# EAGLE board B4SR3350 (EAGLE 9.3.0), part 1 of 3
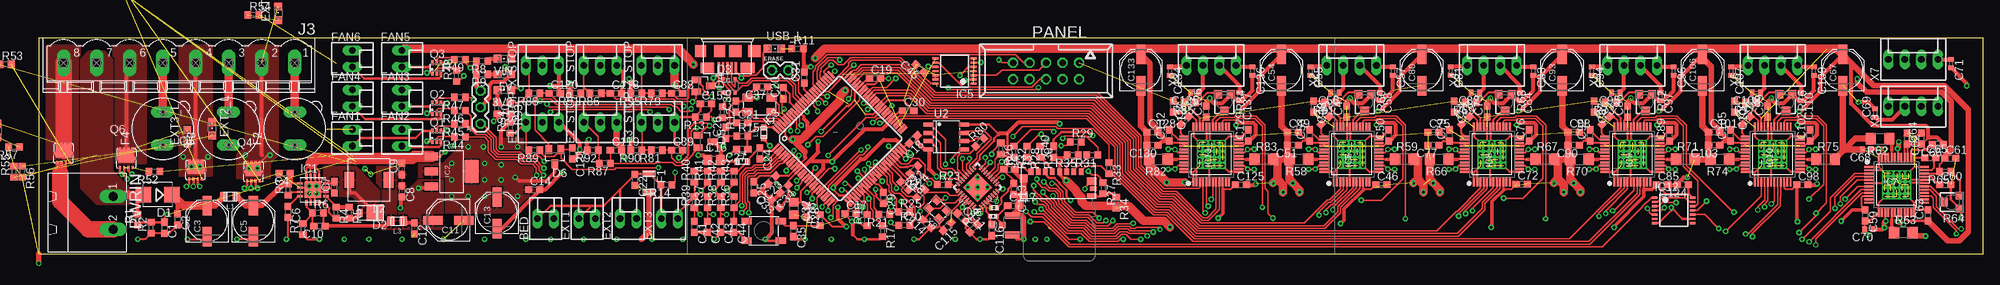
[diagram p0: board, top side]
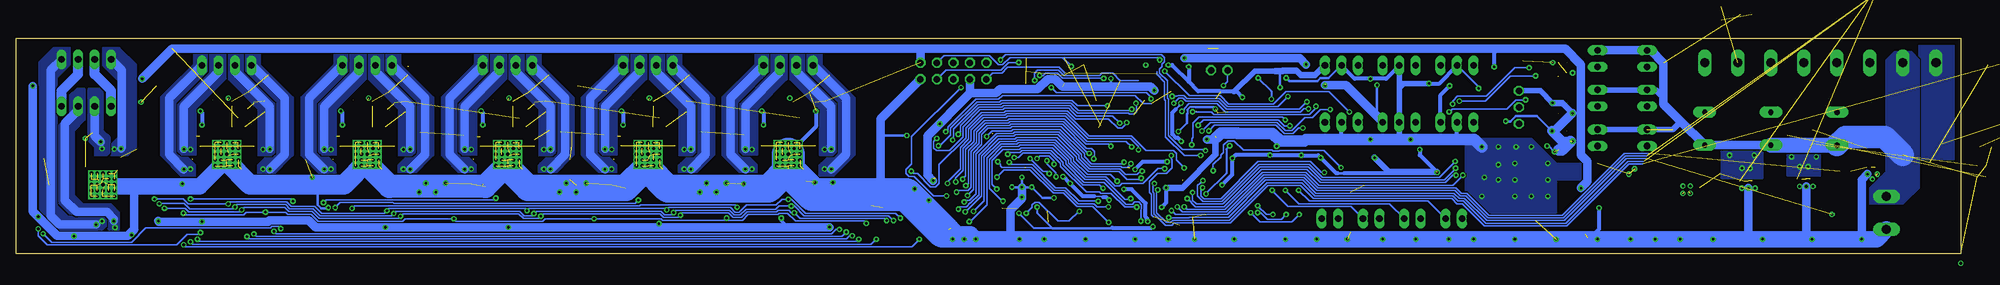
[diagram p1: board, bottom side, seen from below]

Size 299.08 x 33.27 mm. Coordinates in mm from the lower left corner, seen from the top.
Outline: 0,0 299.08,0 299.08,33.27 0,33.27 0,0
Copper layers (1*16): Top 0.035mm / dielectric 1.5mm / Bottom 0.035mm
Design rules "default *": minimum track width 8mil, minimum drill 0.4mm, track to track 8mil, track to pad 10mil, pad to pad 8mil, via to via 10mil, smd to smd 8mil, copper to edge 40mil, drill to drill 6mil, minimum pad ring 10mil, minimum via ring 8mil, stop-mask expansion 4mil, vias tented up to drill 16mil, thermal gap 10mil
Net classes: 3 usbvcc: width 0.102 mm, drill 0.1 mm, clearance 0.15 mm; 4 diff: width 0.203 mm

## Footprints (pad centres in the part's own frame; a part is rotated, then mirrored left to right if it is on the bottom)
CHIPLED_0805 = smd 1.2 x 1.2: A 0,-1.05; C 0,1.05
MOLEX-KK-254-2 = drill 1.02 long: 1 -1.27,0; 2 1.27,0
C0603 = smd 1.1 x 1: 1 -0.85,0; 2 0.85,0
PANASONIC_D = smd 3 x 1.4: + 2.4,0; - -2.4,0
C0805 = smd 1.3 x 1.5: 1 -0.95,0; 2 0.95,0
C0402 = smd 0.7 x 0.9: 1 -0.65,0; 2 0.65,0
SMB = smd 2.4 x 2.4: A 2.2,0; C -2.2,0
DO220AAL = smd 2.667 x 2.54: P$1 -0.7,0 | smd 0.762 x 1.27: P$2 1.65,0
SOT143B = smd 0.88 x 0.55: 1 -0.75,-1.1 | smd 0.48 x 0.55: 2 0.95,-1.1; 3 0.95,1.1; 4 -0.95,1.1
SOT23 = smd 1 x 1.4: 1 -0.95,-1.1; 2 0.95,-1.1; 3 0,1.1
MOLEX-KK-254-3 = drill 1.02 long: 1 -2.54,0; 2 0,0; 3 2.54,0
1X02_SMALL = drill 1.016 octagon: 1 0,0; 2 2.54,0
MC36207 = smd 1 x 2: 1 -1.45,0; 2 1.45,0
19560 = drill 0.813 pad 1.778 long: 1 -2.54,0; 2 2.54,0
QFN16-4X4 = smd 0.8 x 0.35: 1 -2,0.975; 2 -2,0.325; 3 -2,-0.325; 4 -2,-0.975; 9 2,-0.975; 10 2,-0.325; 11 2,0.325; 12 2,0.975 | smd 0.35 x 0.8: 5 -0.975,-2; 6 -0.325,-2; 7 0.325,-2; 8 0.975,-2; 13 0.975,2; 14 0.325,2; 15 -0.325,2; 16 -0.975,2 | smd 2.5 x 2.5: EXP 0,0
SOT223 = smd 2.235 x 1.219: 1 -3.099,2.311; 2 -3.099,0; 3 -3.099,-2.311 | smd 2.2 x 3.6: 4 3.099,0
LQFP100 = smd 1.5 x 0.35: 1 -7.875,6; 2 -7.875,5.5; 3 -7.875,5; 4 -7.875,4.5; 5 -7.875,4; 6 -7.875,3.5; 7 -7.875,3; 8 -7.875,2.5; 9 -7.875,2; 10 -7.875,1.5; 11 -7.875,1; 12 -7.875,0.5; 13 -7.875,0; 14 -7.875,-0.5; 15 -7.875,-1; 16 -7.875,-1.5; 17 -7.875,-2; 18 -7.875,-2.5; 19 -7.875,-3; 20 -7.875,-3.5; 21 -7.875,-4; 22 -7.875,-4.5; 23 -7.875,-5; 24 -7.875,-5.5; 25 -7.875,-6; 51 7.875,-6; 52 7.875,-5.5; 53 7.875,-5; 54 7.875,-4.5; 55 7.875,-4; 56 7.875,-3.5; 57 7.875,-3; 58 7.875,-2.5; 59 7.875,-2; 60 7.875,-1.5; 61 7.875,-1; 62 7.875,-0.5; 63 7.875,0; 64 7.875,0.5; 65 7.875,1; 66 7.875,1.5; 67 7.875,2; 68 7.875,2.5; 69 7.875,3; 70 7.875,3.5; 71 7.875,4; 72 7.875,4.5; 73 7.875,5; 74 7.875,5.5; 75 7.875,6 | smd 0.35 x 1.5: 26 -6.025,-7.875; 27 -5.525,-7.875; 28 -5.025,-7.875; 29 -4.525,-7.875; 30 -4.025,-7.875; 31 -3.525,-7.875; 32 -3.025,-7.875; 33 -2.525,-7.875; 34 -2.025,-7.875; 35 -1.525,-7.875; 36 -1.025,-7.875; 37 -0.525,-7.875; 38 -0.025,-7.875; 39 0.475,-7.875; 40 0.975,-7.875; 41 1.475,-7.875; 42 1.975,-7.875; 43 2.475,-7.875; 44 2.975,-7.875; 45 3.475,-7.875; 46 3.975,-7.875; 47 4.475,-7.875; 48 4.975,-7.875; 49 5.475,-7.875; 50 5.975,-7.875; 76 6,7.875; 77 5.5,7.875; 78 5,7.875; 79 4.5,7.875; 80 4,7.875; 81 3.5,7.875; 82 3,7.875; 83 2.5,7.875; 84 2,7.875; 85 1.5,7.875; 86 1,7.875; 87 0.5,7.875; 88 0,7.875; 89 -0.5,7.875; 90 -1,7.875; 91 -1.5,7.875; 92 -2,7.875; 93 -2.5,7.875; 94 -3,7.875; 95 -3.5,7.875; 96 -4,7.875; 97 -4.5,7.875; 98 -5,7.875; 99 -5.5,7.875; 100 -6,7.875
TSSOP14 = smd 0.35 x 0.9: 1 -1.95,-2.925; 2 -1.3,-2.925; 3 -0.65,-2.925; 4 0,-2.925; 5 0.65,-2.925; 6 1.3,-2.925; 7 1.95,-2.925; 8 1.95,2.925; 9 1.3,2.925; 10 0.65,2.925; 11 0,2.925; 12 -0.65,2.925; 13 -1.3,2.925; 14 -1.95,2.925
QFP50P900X900X113-49N_NOFID = smd 1.45 x 0.3: 1 -4.2,2.75; 2 -4.2,2.25; 3 -4.2,1.75; 4 -4.2,1.25; 5 -4.2,0.75; 6 -4.2,0.25; 7 -4.2,-0.25; 8 -4.2,-0.75; 9 -4.2,-1.25; 10 -4.2,-1.75; 11 -4.2,-2.25; 12 -4.2,-2.75; 25 4.2,-2.75; 26 4.2,-2.25; 27 4.2,-1.75; 28 4.2,-1.25; 29 4.2,-0.75; 30 4.2,-0.25; 31 4.2,0.25; 32 4.2,0.75; 33 4.2,1.25; 34 4.2,1.75; 35 4.2,2.25; 36 4.2,2.75 | smd 0.3 x 1.45: 13 -2.75,-4.2; 14 -2.25,-4.2; 15 -1.75,-4.2; 16 -1.25,-4.2; 17 -0.75,-4.2; 18 -0.25,-4.2; 19 0.25,-4.2; 20 0.75,-4.2; 21 1.25,-4.2; 22 1.75,-4.2; 23 2.25,-4.2; 24 2.75,-4.2; 37 2.75,4.2; 38 2.25,4.2; 39 1.75,4.2; 40 1.25,4.2; 41 0.75,4.2; 42 0.25,4.2; 43 -0.25,4.2; 44 -0.75,4.2; 45 -1.25,4.2; 46 -1.75,4.2; 47 -2.25,4.2; 48 -2.75,4.2 | smd 4.45 x 4.45: PAD 0,0
USB-MICRO-10103594 = smd 0.4 x 1.6: D+ 0,0; D- -0.65,0; GND 1.3,0; ID 0.65,0; VBUS -1.3,0 | smd 1.9 x 1.9: SHLD1 -1.2,-2.55; SHLD2 1.2,-2.55; SHLD3 -4.15,-2.55; SHLD4 4.15,-2.55 | smd 2.1 x 1.6: SHLD5 3.1,0; SHLD6 -3.1,0
MOLEX-47571 = smd 0.7 x 1: 1 3.85,0; 2 2.75,0; 3 1.65,0; 4 0.55,0; 5 -0.55,0; 6 -1.65,0; 7 -2.75,0; 8 -3.85,0 | smd 1.15 x 1.2: G1 -4.925,-1.05; G2 -4.925,-3.64 | smd 1.45 x 1.2: G3 5.475,-1.49 | smd 1 x 0.7: G4 5.7,-2.64 | smd 1.4 x 0.9: G5 5.5,-3.79
MSTBV8 = drill 1.397 long: 1 -17.78,0; 2 -12.7,0; 3 -7.62,0; 4 -2.54,0; 5 2.54,0; 6 7.62,0; 7 12.7,0; 8 17.78,0
U.FL = smd 1.05 x 2.2: GND1 -1.475,0; GND2 1.475,0 | smd 1 x 1.05: SIG 0,-1.525
1X03_SMALL = drill 1.016 octagon: 1 0,0; 2 2.54,0; 3 5.08,0
C0805' = smd 1.5 x 1.25: 1 0,0.95; 2 0,-0.95
SRR0604 = smd 1.5 x 2.5: P$1 3,0; P$2 -3,0
C0603' = smd 1 x 0.95: 1 0,0.8; 2 0,-0.8
C0402' = smd 0.75 x 0.7: 1 0,0.5; 2 0,-0.5
057-010-1 = drill 1 octagon: 1 -5.08,-1.27; 2 -5.08,1.27; 3 -2.54,-1.27; 4 -2.54,1.27; 5 0,-1.27; 6 0,1.27; 7 2.54,-1.27; 8 2.54,1.27; 9 5.08,-1.27; 10 5.08,1.27
MSTBA2 = drill 1.397 long: 1 -2.54,5.08; 2 2.54,5.08
SOT363_PHILIPS = smd 0.4 x 0.8: 1 -0.65,-0.8; 2 0,-0.8; 3 0.65,-0.8; 4 0.65,0.8; 5 0,0.8; 6 -0.65,0.8
3X3DFN-EP = smd 0.35 x 0.5: 1 -0.975,-1.4; 2 -0.325,-1.4; 3 0.325,-1.4; 4 0.975,-1.4 | smd 0.4 x 0.3: 5 0.975,1.5; 6 0.325,1.5; 7 -0.325,1.5; 8 -0.975,1.5 | smd 0.38 x 0.43: E1 -1.415,0; E2 1.415,0 | smd 2.45 x 1.98: PAD 0,0.36
R0603 = smd 1 x 1.1: 1 -0.85,0; 2 0.85,0
R1206 = smd 1.6 x 1.803: 1 -1.422,0; 2 1.422,0
RTRIM3103 = smd 1.2 x 1.25: 1 -1,-1.225; 3 1,-1.225 | smd 1.3 x 1.3: 2 0,1.3
PTS647 = smd 1.55 x 1: A1 -2.625,1.5; A2 2.625,1.5; B1 -2.625,-1.5; B2 2.625,-1.5
QFN32-5X5MM = smd 0.8 x 0.285: 1 -2.5,1.75; 2 -2.5,1.25; 3 -2.5,0.75; 4 -2.5,0.25; 5 -2.5,-0.25; 6 -2.5,-0.75; 7 -2.5,-1.25; 8 -2.5,-1.75; 17 2.5,-1.75; 18 2.5,-1.25; 19 2.5,-0.75; 20 2.5,-0.25; 21 2.5,0.25; 22 2.5,0.75; 23 2.5,1.25; 24 2.5,1.75 | smd 0.285 x 0.8: 9 -1.75,-2.5; 10 -1.25,-2.5; 11 -0.75,-2.5; 12 -0.25,-2.5; 13 0.25,-2.5; 14 0.75,-2.5; 15 1.25,-2.5; 16 1.75,-2.5; 25 1.75,2.5; 26 1.25,2.5; 27 0.75,2.5; 28 0.25,2.5; 29 -0.25,2.5; 30 -0.75,2.5; 31 -1.25,2.5; 32 -1.75,2.5 | smd 3.15 x 3.15: EP 0,0
SOIC08-FAIRCHILD = smd 0.61 x 1.52: 1 -1.905,-2.723; 2 -0.635,-2.723; 3 0.635,-2.723; 4 1.905,-2.723; 5 1.905,2.723; 6 0.635,2.723; 7 -0.635,2.723; 8 -1.905,2.723
5.0X3.2_KX-9A = smd 1.6 x 1.25: 1 -1.85,-1.1; 2 1.85,-1.1; 3 1.85,1.1; 4 -1.85,1.1
MOLEX-KK-254-4 = drill 1.02 long: 1 -3.81,0; 2 -1.27,0; 3 1.27,0; 4 3.81,0
3.2X2.5_KX-7 = smd 1.3 x 1.1: 1 -1.15,-0.9; 2 1.15,-0.9; 3 1.15,0.9; 4 -1.15,0.9

## Placement (x,y rotation side)
3V3  [CHIPLED_0805]  71.63,25.27 90 top
5V  [CHIPLED_0805]  71.63,27.69 90 top
BED  KK-254-2  [MOLEX-KK-254-2]  77.98,5.46 0 top
BED_L  [CHIPLED_0805]  -6.35,19.05 0 top  (outside the outline)
C1  10n  [C0603]  19.3,4.06 270 top
C2  10u  [C0603]  21.34,5.33 270 top
C3  100u  [PANASONIC_D]  25.91,5.08 90 top
C4  10u  [C0603]  37.85,12.45 180 top
C5  100u  [PANASONIC_D]  33.02,5.08 90 top
C6  100n  [C0603]  38.35,6.48 270 top
C7  22n  [C0603]  45.47,10.29 90 top
C8  10u  [C0603]  55.88,9.65 270 top
C9  10u  [C0603]  55.88,13.08 90 top
C10  10n  [C0603]  43.18,4.32 180 top
C11  220u  [PANASONIC_D]  62.99,5.21 180 top
C12  10u  [C0603]  57.78,3.94 270 top
C13  10u  [PANASONIC_D]  70.48,6.35 90 top
C14  10u  [C0603]  76.2,9.91 0 top
C15  100n  [C0603]  102.62,23.11 0 top
C16  10u  [C0805]  103.89,14.48 0 top
C17  100n  [C0603]  124.84,6.22 0 top
C18  100n  [C0603]  134.49,17.65 225 top
C19  100n  [C0603]  128.65,27.07 0 top
C20  100n  [C0603]  114.55,24.77 90 top
C21  100n  [C0603]  108.2,20.19 0 top
C22  2.2u  [C0603]  91.69,11.43 270 top
C23  100n  [C0603]  112.78,11.43 225 top
C24  100n  [C0603]  110.87,15.49 270 top
C25  10u  [C0603]  109.98,10.29 270 top
C26  4u7  [C0603]  105.66,18.67 90 top
C27  100n  [C0603]  108.2,16.13 180 top
C28  100n  [C0603]  118.16,6.53 270 top
C29  100n  [C0603]  129.9,8.64 270 top
C30  100n  [C0603]  133.73,22.1 0 top
C31  100n  [C0603]  117.73,27.18 90 top
C32  10u  [C0805]  116.13,7.04 270 top
C33  100n  [C0603]  113.28,7.75 135 top
C34  2.2u 0.1-10ohm ESR  [C0603]  114.68,10.03 225 top
C35  10n  [C0603]  116.08,3.53 270 top
C36  10p  [C0603]  107.19,22.73 90 top
C37  10p  [C0603]  111.25,25.78 180 top
C38  2.2n  [C0603]  98.17,24.77 0 top
C39  2.2n  [C0603]  98.17,16 0 top
C40  2K2  [C0603]  156.08,15.75 90 top
C41  2.2u  [C0603]  100.84,4.19 270 top
C42  2.2u  [C0603]  102.87,4.19 270 top
C43  2.2u  [C0603]  104.9,4.19 270 top
C44  2.2u  [C0603]  106.93,4.19 270 top
C45  2.2u  [C0603]  135.51,28.57 135 top
C46  100n  [C0603]  206.5,10.67 0 top
C47  4u7  [C0603]  201.17,21.97 90 top
C48  470n  [C0603]  196.09,22.73 270 top
C49  100n  [C0603]  192.91,18.8 0 top
C50  100n  [C0603]  207.65,18.29 90 top
C51  100n  [C0603]  192.91,16.76 180 top
C52  22n  [C0603]  197.87,20.57 45 top
C53  100n  [C0603]  195.45,18.29 90 top
C54  100u  [PANASONIC_D]  191.13,28.32 90 top
C55  470p  [C0402]  195.58,28.19 270 top
C56  470p  [C0402]  199.39,24.89 180 top
C57  470p  [C0402]  208.28,28.19 270 top
C58  470p  [C0402]  206.25,24.26 270 top
C59  100n  [C0603]  280.92,5.97 270 top
C60  4u7  [C0603]  293.24,10.67 0 top
C61  470n  [C0603]  294,14.73 0 top
C62  100n  [C0603]  287.38,17.78 270 top
C63  100n  [C0603]  290.58,5.97 90 top
C64  100n  [C0603]  289.56,17.78 90 top
C65  22n  [C0603]  290.96,14.86 0 top
C66  100n  [C0603]  292.1,16.89 180 top
C67  100u  [PANASONIC_D]  277.5,28.32 90 top
C68  470p  [C0402]  281.18,16.13 180 top
C69  470p  [C0402]  282.45,21.72 90 top
C70  470p  [C0402]  281.51,3.84 180 top
C71  470p  [C0402]  294.13,29.34 270 top
C72  100n  [C0603]  228.09,10.79 0 top
C73  4u7  [C0603]  222.76,21.97 90 top
C74  470n  [C0603]  217.68,22.73 270 top
C75  100n  [C0603]  214.5,18.8 0 top
C76  100n  [C0603]  229.24,18.29 90 top
C77  100n  [C0603]  214.5,16.76 180 top
C78  22n  [C0603]  219.46,20.57 45 top
C79  100n  [C0603]  217.04,18.29 90 top
C80  100u  [PANASONIC_D]  212.72,28.32 90 top
C81  470p  [C0402]  217.17,28.19 270 top
C82  470p  [C0402]  220.98,24.89 180 top
C83  470p  [C0402]  229.87,28.19 270 top
C84  470p  [C0402]  227.84,24.26 270 top
C85  100n  [C0603]  249.68,10.67 0 top
C86  4u7  [C0603]  244.35,21.97 90 top
C87  470n  [C0603]  239.27,22.73 270 top
C88  100n  [C0603]  236.09,18.8 0 top
C89  100n  [C0603]  250.82,18.29 90 top
C90  100n  [C0603]  236.09,16.76 180 top
C91  22n  [C0603]  241.05,20.57 45 top
C92  100n  [C0603]  238.63,18.29 90 top
C93  100u  [PANASONIC_D]  234.31,28.32 90 top
C94  470p  [C0402]  238.89,28.19 270 top
C95  470p  [C0402]  242.57,24.89 180 top
C96  470p  [C0402]  251.46,28.19 270 top
C97  470p  [C0402]  249.43,24.26 270 top
C98  100n  [C0603]  271.27,10.67 0 top
C99  4u7  [C0603]  265.94,21.97 90 top
C100  470n  [C0603]  260.86,22.73 270 top
C101  100n  [C0603]  257.68,18.8 0 top
C102  100n  [C0603]  272.42,18.29 90 top
C103  100n  [C0603]  257.68,16.76 180 top
C104  22n  [C0603]  262.64,20.57 45 top
C105  100n  [C0603]  260.22,18.29 90 top
C106  100u  [PANASONIC_D]  255.91,28.32 90 top
C107  470p  [C0402]  260.35,28.19 270 top
C108  470p  [C0402]  264.16,24.89 180 top
C109  470p  [C0402]  273.05,28.19 270 top
C110  470p  [C0402]  271.02,24.26 270 top
C111  1u  [C0603]  141.91,5.66 315 top
C112  100n  [C0603]  149.28,13.08 0 top
C113  10u  [C0603]  149.99,10.03 270 top
C114  6.8p  [C0603]  136.6,4.7 135 top
C115  6.8p  [C0603]  139.73,4.24 225 top
C116  3.0p  [C0603]  146.56,3.68 270 top
C117  2.4p  [C0603]  149.89,7.44 0 top
C118  2.2n  [C0603]  88.77,24.77 0 top
C119  2.2n  [C0603]  88.77,16 0 top
C120  2.2n  [C0603]  79.38,24.77 0 top
C121  2.2n  [C0603]  82.04,15.49 270 top
C124  100n  [C0603]  252.86,10.67 180 top
C125  100n  [C0603]  184.91,10.67 0 top
C126  4u7  [C0603]  179.58,21.97 90 top
C127  470n  [C0603]  174.5,22.73 270 top
C128  100n  [C0603]  171.32,18.8 0 top
C129  100n  [C0603]  186.06,18.29 90 top
C130  100n  [C0603]  171.32,16.76 180 top
C131  22n  [C0603]  176.28,20.57 45 top
C132  100n  [C0603]  173.86,18.29 90 top
C133  100u  [PANASONIC_D]  169.54,28.32 90 top
C134  470p  [C0402]  173.99,28.19 270 top
C135  470p  [C0402]  177.8,24.89 180 top
C136  470p  [C0402]  186.69,28.19 270 top
C137  470p  [C0402]  184.66,24.26 270 top
D1  [SMB]  18.29,9.14 180 top
D2  SS1P3L  [DO220AAL]  51.05,6.35 180 top
D3  PRTR5V0U2XB  [SOT143B]  106.17,25.91 0 top
D4  BAT54C  [SOT23]  102.23,25.91 270 top
D5  BAT54C  [SOT23]  102.49,17.31 270 top
D6  BAT54C  [SOT23]  79.38,14.99 180 top
E1_STOP  KK-254-3  [MOLEX-KK-254-3]  77.47,20.32 0 top
E2_STOP  KK-254-3  [MOLEX-KK-254-3]  86.36,20.32 0 top
E3_STOP  KK-254-3  [MOLEX-KK-254-3]  95.25,20.32 0 top
ERASE  [1X02_SMALL]  112.78,28.32 0 top
EXT1  KK-254-2  [MOLEX-KK-254-2]  84.33,5.46 0 top
EXT1_L  [CHIPLED_0805]  36.83,37.08 0 top
EXT2  KK-254-2  [MOLEX-KK-254-2]  90.68,5.46 0 top
EXT2_L  [CHIPLED_0805]  26.67,19.3 0 top
EXT3  KK-254-2  [MOLEX-KK-254-2]  97.03,5.46 0 top
EXT3_L  [CHIPLED_0805]  22.86,18.03 0 top
F1  MC36207  [MC36207]  93.85,10.92 270 top
F2  [19560]  39.37,19.3 90 top
F3  [19560]  29.21,19.3 90 top
F4  [19560]  19.05,19.3 90 top
FAN1  KK-254-2  [MOLEX-KK-254-2]  48.26,17.91 270 top
FAN2  KK-254-2  [MOLEX-KK-254-2]  55.88,17.91 270 top
FAN3  KK-254-2  [MOLEX-KK-254-2]  55.88,24 270 top
FAN4  KK-254-2  [MOLEX-KK-254-2]  48.26,24 270 top
FAN5  KK-254-2  [MOLEX-KK-254-2]  55.88,30.1 270 top
FAN6  KK-254-2  [MOLEX-KK-254-2]  48.26,30.1 270 top
IC1  A4403  [QFN16-4X4]  42.16,9.91 0 top
IC2  LDO-TS1117CW-3V3  [SOT223]  63.5,12.7 0 top
IC3  ATSAM4S8C  [LQFP100]  123.19,17.78 45 top
IC5  74HC125TSSOP14  [TSSOP14]  140.84,28.19 90 top
IC6  TMC5130  [QFP50P900X900X113-49N_NOFID]  201.93,15.37 90 top
IC7  TMC5130  [QFP50P900X900X113-49N_NOFID]  285.75,10.67 0 top
IC8  TMC5130  [QFP50P900X900X113-49N_NOFID]  223.52,15.37 90 top
IC9  TMC5130  [QFP50P900X900X113-49N_NOFID]  245.11,15.37 90 top
IC10  TMC5130  [QFP50P900X900X113-49N_NOFID]  266.7,15.37 90 top
IC12  CD4072B-TSSOP14  [TSSOP14]  251.46,6.73 270 top
IC13  TMC5130  [QFP50P900X900X113-49N_NOFID]  180.34,15.37 90 top
J1  ZX62-AB-5PA  [USB-MICRO-10103594]  105.92,28.7 180 top
J2  MOLEX-SD-47571-001  [MOLEX-47571]  156.46,12.7 0 top
J3  MSTBV8  [MSTBV8]  21.59,29.46 180 top
J4  U.FL  [U.FL]  149.73,4.45 270 top
J5  [1X03_SMALL]  67.94,20.07 90 top
L1  MH2029-300Y  [C0805']  29.46,8.89 90 top
L2  10uH  [SRR0604]  50.8,11.43 180 top
L3  MPZ2012S221A  [C0805']  55.12,5.08 90 top
L4  10uH 100MHz  [C0603']  108.2,14.22 270 top
L5  10uH 100MHz  [C0603']  111.51,18.67 0 top
L7  4.3nH  [C0402']  146.94,7.11 270 top
L8  2.2nH  [C0402']  146.81,5.84 90 top
PANEL  057-010-1  [057-010-1]  154.94,28.19 180 top
PWRIN  MSTBA2  [MSTBA2]  6.35,6.35 270 top
Q1  NX138BKS  [SOT363_PHILIPS]  61.21,18.16 0 top
Q2  NX138BKS  [SOT363_PHILIPS]  61.21,22.48 0 top
Q3  NX138BKS  [SOT363_PHILIPS]  61.21,28.7 0 top
Q4  AON7524  [3X3DFN-EP]  33.02,12.7 0 top
Q5  AON7524  [3X3DFN-EP]  24.13,12.95 0 top
Q6  AON7524  [3X3DFN-EP]  13.46,14.73 0 top
Q7  AON7524  [3X3DFN-EP]  3.81,15.49 0 top
R1  47K  [R0603]  15.24,5.33 90 top
R2  4.7K  [R0603]  17.27,4.06 90 top
R3  100K  [R0603]  38.35,9.91 90 top
R4  0R1  [R0603]  45.72,6.35 270 top
R5  0R1  [R0603]  47.75,6.35 270 top
R6  3K92  [R0603]  42.93,6.35 0 top
R7  750R  [R0603]  40.64,3.81 90 top
R8  4K7  [R0603]  68.2,29.72 180 top
R9  2K2  [R0603]  68.2,27.69 180 top
R10  180R  [R0603]  70.48,22.48 270 top
R11  2K2  [R0603]  116.71,31.62 0 top
R12  27K  [R0603]  105.16,21.84 270 top
R13  47K  [R0603]  101.85,21.08 180 top
R14  10K  [R0603]  96.52,10.67 180 top
R15  1R  [R0603]  108.2,18.16 0 top
R16  10K  [R0603]  120.19,5.26 90 top
R17  4K7  [R0603]  129.79,3.56 270 top
R18  470R  [R0603]  133.22,10.54 315 top
R19  47R  [R0603]  127.38,5.21 90 top
R20  47R  [R0603]  133.1,4.45 0 top
R21  47R  [R0603]  130.05,6.1 180 top
R22  2K2  [R0603]  134.62,12.99 225 top
R23  2K2  [R0603]  139.07,10.71 0 top
R24  1k  [R0603]  135.67,9.31 45 top
R25  2K2  [R0603]  133.1,6.48 0 top
R26  2K2  [R0603]  147.96,16.26 270 top
R27  220R  [R0603]  163.7,10.16 270 top
R28  220R  [R0603]  152.02,15.75 270 top
R29  220R  [R0603]  159.51,17.27 0 top
R30  100R  [R0603]  154.05,15.75 270 top
R31  220R  [R0603]  162.05,15.24 180 top
R32  220R  [R0603]  149.99,15.75 270 top
R33  220R  [R0603]  164.59,13.21 270 top
R34  10K  [R0603]  165.74,7.92 270 top
R35  10K  [R0603]  159,15.24 180 top
R36  10K  [R0603]  106.93,8 90 top
R37  10K  [R0603]  102.87,8 90 top
R38  10K  [R0603]  104.9,8 90 top
R39  10K  [R0603]  100.84,8 90 top
R40  4K7 0.1%  [R0603]  100.84,11.94 90 top
R41  4K7 0.1%  [R0603]  102.87,11.94 90 top
R42  4K7 0.1%  [R0603]  104.9,11.94 90 top
R43  4K7 0.1%  [R0603]  106.93,11.94 90 top
R44  1K  [R0603]  64.77,18.03 180 top
R45  1K  [R0603]  64.77,20.07 180 top
R46  1K  [R0603]  64.77,22.1 180 top
R47  1K  [R0603]  64.77,24.13 180 top
R48  1K  [R0603]  64.26,27.43 90 top
R49  1K  [R0603]  64.77,29.97 180 top
R50  180R  [R0603]  11.43,41.91 0 top  (outside the outline)
R51  180R  [R0603]  11.43,41.91 0 top  (outside the outline)
R52  180R  [R0603]  17.78,12.7 180 top
R53  180R  [R0603]  -5.08,29.21 0 top  (outside the outline)
R54  4K7  [R0603]  33.02,36.83 0 top  (outside the outline)
R55  4K7  [R0603]  -3.81,12.7 90 top  (outside the outline)
R56  4K7  [R0603]  -2.54,12.7 270 top
R57  4K7  [R0603]  -3.81,16.51 180 top
R58  0R11  [R1206]  193.8,14.61 180 top
R59  0R11  [R1206]  210.06,14.61 0 top
R60  20K  [RTRIM3103]  203.96,23.37 180 top
R61  20K  [R0603]  198.63,23.37 180 top
R62  0R11  [R1206]  283.21,17.78 180 top
R63  0R11  [R1206]  286.77,3.3 0 top
R64  20K  [RTRIM3103]  294.26,8 90 top
R65  20K  [R0603]  293.24,12.7 180 top
R66  0R11  [R1206]  215.39,14.61 180 top
R67  0R11  [R1206]  231.65,14.61 0 top
R68  20K  [RTRIM3103]  225.55,23.37 180 top
R69  20K  [R0603]  220.22,23.37 180 top
R70  0R11  [R1206]  236.98,14.61 180 top
R71  0R11  [R1206]  253.24,14.61 0 top
R72  20K  [RTRIM3103]  247.14,23.37 180 top
R73  20K  [R0603]  241.81,23.37 180 top
R74  0R11  [R1206]  258.57,14.61 180 top
R75  0R11  [R1206]  274.83,14.61 0 top
R76  20K  [RTRIM3103]  268.73,23.37 180 top
R77  20K  [R0603]  263.4,23.37 180 top
R78  12K 1%  [R0603]  143.78,3.98 45 top
R79  10K  [R0603]  95.05,24.77 180 top
R80  200R  [R0603]  144.74,17.22 45 top
R81  10K  [R0603]  95.05,16 180 top
R82  0R11  [R1206]  172.21,14.61 180 top
R83  0R11  [R1206]  188.47,14.61 0 top
R84  20K  [RTRIM3103]  182.37,23.37 180 top
R85  20K  [R0603]  177.04,23.37 180 top
R86  10K  [R0603]  85.65,24.77 180 top
R87  10K  [R0603]  87.05,13.97 180 top
R88  10K  [R0603]  76.25,24.77 180 top
R89  10K  [R0603]  76.25,16 180 top
R90  10K  [R0603]  91.95,16 180 top
R91  10K  [R0603]  82.55,24.77 180 top
R92  10K  [R0603]  85.22,16 180 top
R93  10K  [R0603]  72.52,22.48 270 top
R94  10K  [R0603]  72.52,19.43 90 top
R95  10K  [R0603]  91.95,24.77 180 top
RESET  PTS647  [PTS647]  111.51,3.56 0 top
U1  ESP8266  [QFN32-5X5MM]  144.4,10.29 135 top
U2  [SOIC08-FAIRCHILD]  139.57,18.03 270 top
USB_L  [CHIPLED_0805]  113.16,31.65 270 top
VIN  [CHIPLED_0805]  71.63,30.1 90 top
X1  12MHz  [5.0X3.2_KX-9A]  110.87,22.99 180 top
X2  KK-254-4  [MOLEX-KK-254-4]  201.93,29.08 0 top
X3  KK-254-4  [MOLEX-KK-254-4]  288.29,22.73 0 top
X4  KK-254-4  [MOLEX-KK-254-4]  223.52,29.08 0 top
X5  KK-254-4  [MOLEX-KK-254-4]  245.11,29.08 0 top
X6  KK-254-4  [MOLEX-KK-254-4]  266.7,29.08 0 top
X7  KK-254-4  [MOLEX-KK-254-4]  288.29,29.97 0 top
X8  [3.2X2.5_KX-7]  138.28,6.86 135 top
X9  KK-254-4  [MOLEX-KK-254-4]  180.34,29.08 0 top
X_STOP  KK-254-3  [MOLEX-KK-254-3]  77.47,29.08 0 top
Y_STOP  KK-254-3  [MOLEX-KK-254-3]  86.36,29.08 0 top
Z_STOP  KK-254-3  [MOLEX-KK-254-3]  95.25,29.08 0 top

## Library data of the parts
3V3 5V BED_L EXT1_L EXT2_L EXT3_L USB_L VIN = led
BED E1_STOP E2_STOP E3_STOP EXT1-EXT3 FAN1-FAN6 X2-X7 X9 X_STOP Y_STOP Z_STOP = con-other
C1-C121 C125-C137 R1-R95 = resistor
C124 = rcl; SPICEPREFIX: C
D1 D4-D6 = diode
D2 = Diodi; CASE: SMP; MONTHLY_USAGE: _____; PART_NUMBER: SS1P3L-M3/84A; PRICE: _____; SUPPLIER: _____; TYPE: Diodi
D3 J1 L1 L3 = Arduino
ERASE J5 = SparkFun-Connectors
F1 IC1 IC3 IC5 IC12 J2 J4 Q1-Q7 RESET U2 X1 X8 = misc
F2-F4 = fuse; MPN: 56000001009; OC_FARNELL: 1185363; OC_NEWARK: 15P8392
IC2 = we-power
IC6-IC10 IC13 = TMC5130_3D_Printer_BOARD_V_2; OC_DIGIKEY: _
J3 = con-phoenix-508; MPN: MSTBV 2,5/8-GF-5.08; OC_FARNELL: 1792797; OC_NEWARK: 69R9850
L2 = Arduino-DUE-V03
L4 L5 L7 L8 = Zero_V1.0
PANEL = con-panduit; OC_FARNELL: unknown; OC_NEWARK: unknown
PWRIN = con-phoenix-508; MF: FARNELL; MPN: 1757242; OC_FARNELL: 3705171; OC_NEWARK: 71C4161
U1 = SparkFun-RF; PROD_ID: IC-12452

## Nets
3V3_LED: 3V3.C R10.1
5V_E1: C126.1 IC13.33
5V_E2: C47.1 IC6.33
5V_E3: C73.1 IC8.33
5V_LED: 5V.C R9.1
5V_X: C86.1 IC9.33
5V_Y: C99.1 IC10.33
5V_Z: C60.1 IC7.33
24V_LED: R8.1 VIN.C
+3V3: 3V3.A C13.+ C14.1 C16.2 C17.2 C18.2 C19.2 C20.2 C21.2 C23.1 C25.1 C40.1 C45.1 C46.1 C59.1 C72.1 C85.1 C98.1 C111.1 C112.1 C113.1 C124.1 C125.1 D4.3 D5.3 D6.3 E1_STOP.2 E2_STOP.2 E3_STOP.2 ERASE.1 IC2.2 IC2.4 IC3.10 IC3.27 IC3.50 IC3.69 IC3.91 IC3.98 IC5.14 IC6.10 IC7.10 IC8.10 IC9.10 IC10.10 IC12.14 IC13.10 J2.4 L4.2 L7.1 PANEL.8 R16.2 R34.2 R35.2 R90.2 R91.2 R92.2 R93.2 R94.2 R95.2 U1.1 U1.11 U1.17 U1.29 U1.30 U2.8 X_STOP.2 Y_STOP.2 Z_STOP.2
+5V: 5V.A C11.+ C12.1 C48.1 C61.1 C74.1 C87.1 C100.1 C127.1 IC2.3 IC6.34 IC7.34 IC8.34 IC9.34 IC10.34 IC13.34 J5.2 L3.2 PANEL.1 R61.2 R65.2 R69.2 R73.2 R77.2 R85.2
+12V: C49.2 C50.1 C51.1 C53.1 C54.+ C62.2 C63.1 C64.1 C66.1 C67.+ C75.2 C76.1 C77.1 C79.1 C80.+ C88.2 C89.1 C90.1 C92.1 C93.+ C101.2 C102.1 C103.1 C105.1 C106.+ C128.2 C129.1 C130.1 C132.1 C133.+ D1.A F2.1 F3.1 F4.1 FAN1.1 FAN2.1 FAN3.1 FAN4.1 FAN5.1 FAN6.1 IC6.21 IC6.39 IC6.40 IC7.21 IC7.39 IC7.40 IC8.21 IC8.39 IC8.40 IC9.21 IC9.39 IC9.40 IC10.21 IC10.39 IC10.40 IC13.21 IC13.39 IC13.40 J3.7 PWRIN.1 R1.2 R54.2 R55.2 R56.2 R57.2 VIN.A
A1_E1: C134.1 IC13.46 X9.1
A1_E2: C55.1 IC6.46 X2.1
A1_E3: C81.1 IC8.46 X4.1
A1_X: C94.1 IC9.46 X5.1
A1_Y: C107.1 IC10.46 X6.1
A1_Z: C68.1 IC7.46 X7.1
A2_E1: C135.1 IC13.42 X9.2
A2_E2: C56.1 IC6.42 X2.2
A2_E3: C82.1 IC8.42 X4.2
A2_X: C95.1 IC9.42 X5.2
A2_Y: C108.1 IC10.42 X6.2
A2_Z: C69.1 IC7.42 X3.2
A_Z2: X3.1 X7.2
ADVREF: C24.1 IC3.1 L4.1 R40.2 R41.2 R42.2 R43.2
ANTENNA: C117.1 J4.SIG L8.2
B1_E1: C136.1 IC13.15 X9.4
B1_E2: C57.1 IC6.15 X2.4
B1_E3: C83.1 IC8.15 X4.4
B1_X: C96.1 IC9.15 X5.4
B1_Y: C109.1 IC10.15 X6.4
B1_Z: C70.1 IC7.15 X3.3
B2_E1: C137.1 IC13.19 X9.3
B2_E2: C58.1 IC6.19 X2.3
B2_E3: C84.1 IC8.19 X4.3
B2_X: C97.1 IC9.19 X5.3
B2_Y: C110.1 IC10.19 X6.3
B2_Z: C71.1 IC7.19 X7.4
B_Z2: X3.4 X7.3
BED: IC3.30 R53.1
BED_D: BED_L.C J3.8 Q7.5 Q7.6 Q7.7 Q7.8 Q7.E1 Q7.E2 Q7.PAD
BED_G: Q7.4 R53.2
BED_L: BED_L.A R57.1
BOOT: C7.1 IC1.11
BRA_E1: IC13.44 R82.1
BRA_E2: IC6.44 R58.1
BRA_E3: IC8.44 R66.1
BRA_X: IC9.44 R70.1
BRA_Y: IC10.44 R74.1
BRA_Z: IC7.44 R62.1
BRB_E1: IC13.17 R83.1
BRB_E2: IC6.17 R59.1
BRB_E3: IC8.17 R67.1
BRB_X: IC9.17 R71.1
BRB_Y: IC10.17 R75.1
BRB_Z: IC7.17 R63.1
CLK: J2.5 R30.2
CMD: J2.3 R29.2 R35.1
CPI_E1: C131.1 IC13.37
CPI_E2: C52.1 IC6.37
CPI_E3: C78.1 IC8.37
CPI_X: C91.1 IC9.37
CPI_Y: C104.1 IC10.37
CPI_Z: C65.1 IC7.37
CPO_E1: C131.2 IC13.35
CPO_E2: C52.2 IC6.35
CPO_E3: C78.2 IC8.35
CPO_X: C91.2 IC9.35
CPO_Y: C104.2 IC10.35
CPO_Z: C65.2 IC7.35
DAT0: J2.7 R28.2
DAT1: J2.8 R32.2
DAT2: J2.1 R33.2
DAT3: J2.2 R31.2
DET: J2.G5 R27.2 R34.1
E1_DIR: IC3.75 IC13.9
E1_EN: IC3.79 IC13.3
E1_FUSED: F2.2 J3.1
E1_STEP: IC3.78 IC13.8
E1_STOP: C121.1 D6.1 IC3.8 R89.1
E1_STOP_IN: E1_STOP.1 R89.2 R94.1
E2_DIR: IC3.72 IC6.9
E2_EN: IC3.74 IC6.3
E2_FUSED: F3.2 J3.3
E2_STEP: IC3.73 IC6.8
E2_STOP: C119.1 D5.2 IC3.94 R87.1
E2_STOP_IN: E2_STOP.1 R87.2 R92.1
E3_DIR: IC3.62 IC8.9
E3_EN: IC3.66 IC8.3
E3_FUSED: F4.2 J3.5
E3_STEP: IC3.65 IC8.8
E3_STOP: C39.1 D5.1 IC3.92 R81.1
E3_STOP_IN: E3_STOP.1 R81.2 R90.1
EDR_CONN: R25.2 U1.15
ENN: IC3.71 IC6.29 IC7.29 IC8.29 IC9.29 IC10.29 IC13.29
ERASE: ERASE.2 IC3.87
ESP_CS: R26.2 U1.13
ESP_DATA_RDY: IC3.40 R25.1
ESP_EN: IC3.32 R17.1 U1.7
ESP_MISO: IC3.41 R20.2
ESP_MOSI: IC3.33 R21.2
ESP_NPCS0: IC3.42 R26.1
ESP_RESET: IC3.43 R18.1
ESP_RST: R18.2 R22.2 U1.32
ESP_SCK: IC3.31 R19.2
ESP_URXD: IC3.46 R23.1
ESP_UTXD: IC3.44 R24.1
ESP_XIN: C115.1 U1.28 X8.1
ESP_XOUT: C114.2 U1.27 X8.3
EXT1_D: EXT1_L.C J3.2 Q4.5 Q4.6 Q4.7 Q4.8 Q4.E1 Q4.E2 Q4.PAD
EXT1_G: Q4.4 R50.2
EXT1_L: EXT1_L.A R54.1
EXT2_D: EXT2_L.C J3.4 Q5.5 Q5.6 Q5.7 Q5.8 Q5.E1 Q5.E2 Q5.PAD
EXT2_G: Q5.4 R51.2
EXT2_L: EXT2_L.A R55.1
EXT3_D: EXT3_L.C J3.6 Q6.5 Q6.6 Q6.7 Q6.8 Q6.E1 Q6.E2 Q6.PAD
EXT3_G: Q6.4 R52.2
EXT3_L: EXT3_L.A R56.1
FAN1: IC3.21 R44.1
FAN1_D: FAN1.2 Q1.6
FAN1_G: Q2.2 R46.2
FAN1_G1: Q1.2 R44.2
FAN2: IC3.19 R45.1
FAN2_D: FAN2.2 Q1.3
FAN2_G: Q2.5 R47.2
FAN2_G1: Q1.5 R45.2
FAN3: IC3.18 R46.1
FAN3_D: FAN3.2 Q2.6
FAN3_G: Q3.2 R48.2
FAN4: IC3.76 R47.1
FAN4_D: FAN4.2 Q2.3
FAN4_G: Q3.5 R49.2
FAN5: IC3.86 R48.1
FAN5_D: FAN5.2 Q3.6
FAN6: IC3.93 R49.1
FAN6_D: FAN6.2 Q3.3
FB: C10.2 IC1.5 R6.1 R7.2
FLASH_CLK: R80.2 U2.6
FLASH_CS: U1.20 U2.1
FLASH_D: U1.23 U2.5
FLASH_HOLD: U1.18 U2.7
FLASH_Q: U1.22 U2.2
FLASH_WP: U1.19 U2.3
GND: C1.2 C2.2 C3.- C4.2 C5.- C6.2 C8.2 C9.2 C11.- C12.2 C13.- C14.2 C15.1 C16.1 C17.1 C18.1 C19.1 C20.1 C21.1 C22.2 C23.2 C24.2 C25.2 C26.2 C27.2 C28.2 C29.2 C30.2 C31.2 C32.2 C33.2 C34.2 C35.2 C36.2 C37.2 C38.2 C39.2 C40.2 C41.2 C42.2 C43.2 C44.2 C45.2 C46.2 C47.2 C48.2 C49.1 C50.2 C51.2 C54.- C55.2 C56.2 C57.2 C58.2 C59.2 C60.2 C61.2 C62.1 C63.2 C64.2 C67.- C68.2 C69.2 C70.2 C71.2 C72.2 C73.2 C74.2 C75.1 C76.2 C77.2 C80.- C81.2 C82.2 C83.2 C84.2 C85.2 C86.2 C87.2 C88.1 C89.2 C90.2 C93.- C94.2 C95.2 C96.2 C97.2 C98.2 C99.2 C100.2 C101.1 C102.2 C103.2 C106.- C107.2 C108.2 C109.2 C110.2 C111.2 C112.2 C113.2 C114.1 C115.2 C116.2 C117.2 C118.2 C119.2 C120.2 C121.2 C124.2 C125.2 C126.2 C127.2 C128.1 C129.2 C130.2 C133.- C134.2 C135.2 C136.2 C137.2 D3.1 E1_STOP.3 E2_STOP.3 E3_STOP.3 F1.2 IC1.2 IC1.6 IC1.7 IC1.10 IC1.13 IC1.14 IC1.15 IC1.16 IC1.EXP IC2.1 IC3.2 IC3.26 IC3.45 IC3.61 IC3.70 IC3.77 IC3.95 IC5.1 IC5.4 IC5.7 IC5.12 IC5.13 IC6.1 IC6.2 IC6.6 IC6.13 IC6.24 IC6.31 IC6.32 IC6.36 IC6.48 IC6.PAD IC7.1 IC7.2 IC7.6 IC7.13 IC7.24 IC7.31 IC7.32 IC7.36 IC7.48 IC7.PAD IC8.1 IC8.2 IC8.6 IC8.13 IC8.24 IC8.31 IC8.32 IC8.36 IC8.48 IC8.PAD IC9.1 IC9.2 IC9.6 IC9.13 IC9.24 IC9.31 IC9.32 IC9.36 IC9.48 IC9.PAD IC10.1 IC10.2 IC10.6 IC10.13 IC10.24 IC10.31 IC10.32 IC10.36 IC10.48 IC10.PAD IC12.7 IC12.9 IC13.1 IC13.2 IC13.6 IC13.13 IC13.24 IC13.31 IC13.32 IC13.36 IC13.48 IC13.PAD J1.GND J2.6 J2.G1 J2.G2 J2.G3 J4.GND1 J4.GND2 J5.3 PANEL.2 PWRIN.2 Q1.1 Q1.4 Q2.1 Q2.4 Q3.1 Q3.4 Q4.1 Q4.2 Q4.3 Q5.1 Q5.2 Q5.3 Q6.1 Q6.2 Q6.3 Q7.1 Q7.2 Q7.3 R2.1 R7.1 R8.2 R9.2 R10.2 R11.2 R13.2 R17.2 R22.1 R58.2 R59.2 R60.1 R62.2 R63.2 R64.1 R66.2 R67.2 R68.1 R70.2 R71.2 R72.1 R74.2 R75.2 R76.1 R78.1 R82.2 R83.2 R84.1 RESET.B1 RESET.B2 U1.EP U2.4 X1.2 X1.4 X8.2 X8.4 X_STOP.3 Y_STOP.3 Z_STOP.3
HEATER1: IC3.28 R50.1
HEATER2: IC3.25 R51.1
HEATER3: IC3.24 R52.1
IDEK: C26.1 R15.1
IREF_E1: IC13.30 R84.2
IREF_E2: IC6.30 R60.2
IREF_E3: IC8.30 R68.2
IREF_X: IC9.30 R72.2
IREF_Y: IC10.30 R76.2
IREF_Z: IC7.30 R64.2
ISEN: D2.P$2 IC1.8 R4.2 R5.2
LCD_ENC_SW: IC3.82 PANEL.7
LCD_MISO: IC3.53 IC5.8
LCD_MISO_BUF: IC5.9 PANEL.6
LCD_MOSI: IC3.52 IC5.2
LCD_MOSI_BUF: IC5.3 PANEL.5
LCD_SCK: IC3.67 IC5.5
LCD_SCK_BUF: IC5.6 PANEL.4
LCD_SD_CS: IC3.80 IC5.10 PANEL.3
LNA: C116.1 L8.1 U1.2
LX: C7.2 D2.P$1 IC1.12 L2.P$1
MCCDA: IC3.59 R29.1
MCCK: IC3.63 R30.1
MCDA0: IC3.64 R28.1
MCDA1: IC3.81 R32.1
MCDA2: IC3.39 R33.1
MCDA3: IC3.57 R31.1
MISO: R20.1 U1.10
MOSI: R21.1 U1.12
MOT_MISO: IC3.15 IC6.7 IC7.7 IC8.7 IC9.7 IC10.7 IC13.7
MOT_MOSI: IC3.20 IC6.5 IC7.5 IC8.5 IC9.5 IC10.5 IC13.5
MOT_SCK: IC3.22 IC6.4 IC7.4 IC8.4 IC9.4 IC10.4 IC13.4
N$4: IC12.2 IC12.13
PWR_FAIL_DET2: C1.1 IC3.23 R1.1 R2.2
REFIN_E1: R84.3 R85.1
REFIN_E2: R60.3 R61.1
REFIN_E3: R68.3 R69.1
REFIN_X: R72.3 R73.1
REFIN_Y: R76.3 R77.1
REFIN_Z: R64.3 R65.1
RES12K: R78.2 U1.31
RESET: C35.1 IC3.60 R16.1 RESET.A2
SAM_TFR_RDY: IC3.29 U1.16
SD_CD: IC3.58 R27.1
SERVO: IC3.13 J5.1
SG_TST: IC3.17 IC12.1
SG_TST_E1: IC12.5 IC13.27
SG_TST_E2: IC6.27 IC12.4
SG_TST_E3: IC8.27 IC12.3
SG_TST_X: IC9.27 IC12.12
SG_TST_Y: IC10.27 IC12.11
SG_TST_Z: IC7.27 IC12.10
SGND: IC1.9 R4.1 R5.1
SPCK: R19.1 U1.9
SPICLK: R80.1 U1.21
SS: C6.1 IC1.4
T_BED: C42.1 IC3.5 R37.1
T_BED_IN: BED.2 R37.2 R41.1
T_EXT1: C43.1 IC3.4 R38.1
T_EXT1_IN: EXT1.2 R38.2 R42.1
T_EXT2: C44.1 IC3.3 R36.1
T_EXT2_IN: EXT2.2 R36.2 R43.1
T_EXT3: C41.1 IC3.6 R39.1
T_EXT3_IN: EXT3.2 R39.2 R40.1
TON: IC1.3 R3.1
URXD: R23.2 U1.25
URXD1: IC3.7 PANEL.9
USB_LED: R11.1 USB_L.C
USB_N [diff]: D3.3 IC3.88 J1.D-
USB_P [diff]: D3.2 IC3.89 J1.D+
USB_PWR_MON: C15.2 IC3.68 R12.2 R13.1
UTXD: R24.2 U1.26
UTXD1: IC3.9 PANEL.10
VBUS: D3.4 J1.VBUS R12.1 USB_L.A
VCP_E1: C132.2 IC13.38
VCP_E2: C53.2 IC6.38
VCP_E3: C79.2 IC8.38
VCP_X: C92.2 IC9.38
VCP_Y: C105.2 IC10.38
VCP_Z: C66.2 IC7.38
VDD3P3: L7.2 U1.3 U1.4
VDDOUT: C28.1 C29.1 C30.1 C31.1 C32.1 C33.1 C34.1 IC3.11 IC3.16 IC3.36 IC3.56 IC3.85 L5.2
VDDPLL: C27.1 IC3.100 L5.1 R15.2
VIN: C2.1 C3.+ D1.C L1.1
VIN_F: C4.1 C5.+ IC1.1 L1.2 R3.2
VOUT: C8.1 C9.1 C10.1 L2.P$2 L3.1 R6.2
VREF_MON: IC3.12
VSSA: BED.1 C22.1 EXT1.1 EXT2.1 EXT3.1 F1.1 R14.2
VSSA_MON: IC3.14 R14.1
X_DIR: IC3.38 IC9.9
X_EN: IC3.55 IC9.3
X_STEP: IC3.54 IC9.8
X_STOP: C120.1 D6.2 IC3.90 R88.1
X_STOP_IN: R88.2 R93.1 X_STOP.1
XIN: C36.1 IC3.97 X1.3
XOUT: C37.1 IC3.96 X1.1
Y_DIR: IC3.49 IC10.9
Y_EN: IC3.48 IC10.3
Y_STEP: IC3.47 IC10.8
Y_STOP: C118.1 D4.2 IC3.84 R86.1
Y_STOP_IN: R86.2 R91.1 Y_STOP.1
Z_DIR: IC3.34 IC7.9
Z_EN: IC3.37 IC7.3
Z_STEP: IC3.35 IC7.8
Z_STOP: C38.1 D4.1 IC3.83 R79.1
Z_STOP_IN: R79.2 R95.1 Z_STOP.1

## Tracks (layer width: path | path; a pad name or v marks a point on that pad's centre or on a via)
3V3_LED
  Top 0.61: 3V3.C 70.48,25.18 R10.1
5V_E1
  Top 0.305: IC13.33 179.09,20.63 C126.1
5V_E2
  Top 0.305: IC6.33 200.68,20.63 C47.1
5V_E3
  Top 0.305: IC8.33 222.27,20.63 C73.1
5V_LED
  Top 0.61: R9.1 5V.C
5V_X
  Top 0.305: IC9.33 243.86,20.63 C86.1
5V_Y
  Top 0.305: IC10.33 265.45,20.63 C99.1
5V_Z
  Top 0.305: IC7.33 290.98,11.92 292.23,10.67 C60.1
24V_LED
  Top 0.61: R8.1 69.43,30.1 VIN.C
+3V3  (via drill 0.4)  (8 unrouted)
  Top 0.203: C20.2 113.76,25.61 v113.41,25.96
  Top 0.254: 149.06,9.7 149.06,10 149.08,10.03 | 148.08,7.79 148.1,7.82 148.1,8.1 148.12,8.11 148.12,8.15
  Top 0.305: 182.25,10.04 183.41,10.04 184.04,10.67 C125.1 | IC13.10 182.09,10.19 182.25,10.04 | C20.2 115.46,24.71 115.46,23.39 IC3.91 117.42,21.43 | C21.2 109.31,20.45 113.45,20.45 IC3.98 114.83,19.07 114.83,18.27 115.44,17.65 v115.95,17.65 | C25.1 110.88,12.03 C23.1 115.32,12.03 IC3.10 117.33,14.04 117.33,14.13 | 203.84,10.04 205,10.04 205.63,10.67 C46.1 | IC6.10 203.68,10.19 203.84,10.04 | 227.24,10.67 227.22,10.67 226.59,10.04 225.43,10.04 | IC8.10 225.27,10.19 225.43,10.04 | C85.1 248.81,10.67 | IC9.10 246.86,10.19 246.92,10.13 | 246.92,10.13 247.01,10.04 | C98.1 270.4,10.67 269.77,10.04 268.61,10.04 268.45,10.19 IC10.10 | IC3.69 127.33,26.16 128.61,26.16 C19.2 | U1.11 147.24,12.06 | 149.08,10.03 149.94,10.88 C113.1 149.99,11.24 | 149.08,10.03 | U1.1 145.16,7.05 145.16,6.6 144.86,6.3 v144.86,6.28 | C111.1 142.06,7.02 v142.06,7.23 | 225.37,9.98 225.43,10.04 | 246.92,10.02 246.92,10.13 | IC7.10 280.57,8.92 280.42,8.77 280.42,7.32 C59.1 | 203.84,10.04 203.74,9.94 | 182.15,10.02 182.17,10.04 182.25,10.04 | 149.13,10.02 149.08,9.97 149.08,9.69 148.12,8.72 148.12,8.15 | L7.1 147.44,7.3 147.5,7.36 147.64,7.36 148.08,7.79 | 132.02,17.4 IC3.50 133.6,17.05 C18.2 | 143.87,13.36 143.87,13.71 144.79,14.63 144.79,15.27 144.84,15.32 | R94.2 72.3,20.5 | v124.24,4.21 122.09,4.21 R16.2 | C17.2 125.56,6.36 125.56,7.6 IC3.27 124.14,9.01 123.85,9.01 | IC5.14 137.23,26.24 136.11,27.37 C45.1 | U1.30 142.82,7.99 v142.06,7.23 | U1.29 142.81,7.98 v142.06,7.23
  Top 0.406: 157.01,13.97 C40.1 157.81,14.9 R35.2 157.01,14.1 157.01,13.97 | 157.01,13.97 J2.4 | 141.31,6.05 C111.1 | C85.1 250.31,9.19 253.88,9.19 | 253.88,9.19 IC12.14 | 149.13,10.02 149.13,10.03 C113.1 149.99,11.31 148.43,12.88 C112.1 | C112.1 148.25,13.08 147.24,12.06 | C19.2 130.68,27.05 v130.7,27.04 | 157.97,11.74 158.07,11.64 | 131.84,17.58 131.73,17.69 | C112.1 148.97,13.63 148.97,18.47 | 117.88,14.82 117.88,14.68 117.33,14.13 | v122.22,10.21 122.22,9.9 123.1,9.01 123.85,9.01 | L4.2 106.05,14.22 105.79,14.48 C16.2 | D4.3 103.77,26.34 v103.77,27.12 | C124.1 253.71,9.36 253.88,9.19 | v74.17,25.53 72.93,25.53 3V3.A | 117.42,21.43 117.7,21.14 117.7,20.81 | 144.84,15.32 146.95,17.43 146.95,17.8 147.62,18.47 146.15,19.94 U2.8
  Top 0.508: 225.37,9.98 225.33,9.94 225.33,9.91 223.52,8.1 223.52,4.24 v223.39,4.12 | C85.1 248.52,10.35 248.52,10.23 248.22,9.93 247,9.93 246.92,10.02 246.92,8.89 242.32,4.29 v242.32,4.12 | 203.78,9.98 203.74,9.94 203.74,9.91 200.77,6.94 200.77,5.23 v200.22,4.68 | v181.42,5.54 182.15,6.26 182.15,10.02 | v277.24,5.08 278.98,6.82 C59.1 | C98.1 270.42,5.08 v270.51,5 | v158.07,11.3 157.68,11.69 157.55,11.69 157.01,12.23 J2.4 | v73.28,11.81 73.86,11.23 76.96,11.23 76.97,11.24 78.02,11.24 79.38,12.6 D6.3
  Top 0.61: 107.28,14.22 L4.2 | 132.02,17.4 131.84,17.58 129.94,17.58 127.04,14.68 126.47,14.68 122.22,10.42 v122.22,10.21 | 117.88,14.82 117.88,15.72 | v122.92,7.2 122.88,7.16 122.88,5.49 124.16,4.21 v124.24,4.21 | R90.2 91.1,17.36 v90.81,17.65 | R95.2 91.1,26.7 v90.81,26.99 | R91.2 81.79,24.85 v81.79,26.29 | v71.12,16.51 71.12,19.02 72.38,20.28 R94.2 R93.2 | 117.7,20.81 118.27,20.25 118.27,18.65 117.75,18.14 | v105.22,16.61 104.84,16.23 | 104.84,16.23 C16.2 | 104.84,16.23 103.75,17.31 D5.3 | R92.2 84.37,17.4 v84.61,17.65 | v157.04,20.08 156.9,20.23 150.59,20.23 148.9,18.54 147.69,18.54 147.62,18.47
  Top 0.813: v115.95,17.65 117.88,15.72
  Top 1.27: v173.99,4.14 173.05,5.08 169.88,5.08 167.58,7.38 161.08,7.38 160.38,8.09 160.38,8.74 159.62,9.5 159.62,9.75 v158.07,11.3 | v115.95,17.65 117.27,17.65 117.75,18.14 123.25,23.63 123.25,24.44 124.01,25.2 v124.03,25.2
  Bottom 0.203: v113.41,25.96 112.78,26.6 ERASE.1
  Bottom 0.305: v142.06,7.23 142.06,6.33 139.7,3.96 142.57,3.96 144.85,6.24 v144.85,6.28 v144.86,6.28
  Bottom 0.406: v130.7,27.04 130.7,25.89 130.81,25.78 | 130.53,4.06 130.63,3.96 139.7,3.96 | Z_STOP.2 97.24,27.1 98.48,27.1 98.94,26.64 103.29,26.64 v103.77,27.12 | X_STOP.2 74.17,25.78 v74.17,25.53
  Bottom 0.508: v181.42,5.54 181.42,5.22 180.34,4.14 | v200.22,4.68 199.68,4.14 199.64,4.14
  Bottom 0.61: 130.53,4.06 124.39,4.06 v124.24,4.21 124.17,4.21 | v122.22,10.21 122.22,7.9 v122.92,7.2 | Z_STOP.2 95.25,28.99 93.26,26.99 v90.81,26.99 88.35,26.99 86.36,28.99 Y_STOP.2 | v81.79,26.29 80.17,26.29 77.47,28.99 X_STOP.2 | 77.47,17.65 E1_STOP.2 | 95.25,17.65 E3_STOP.2 | v105.22,16.61 105.22,16.83 104.65,17.4 104.39,17.65
  Bottom 0.813: v81.79,26.29 85.72,26.29 86.36,25.65 | 86.36,25.65 E2_STOP.2 86.36,17.65 | 86.36,25.65 86.36,28.99
  Bottom 1.016: 114.62,18.1 114.62,15.3 119.71,10.21 v122.22,10.21
  Bottom 1.27: v173.99,4.14 180.34,4.14 199.64,4.14 217.7,4.14 217.73,4.12 v223.39,4.12 v242.32,4.12 253.03,4.12 254.11,5.2 260.17,5.2 260.37,5 v270.51,5 277.16,5 v277.24,5.08 | v115.95,17.65 115.06,17.65 114.62,18.1 | v124.03,25.2 124.61,25.78 130.81,25.78 138.18,25.78 139.35,26.95 140.42,26.95 141.99,25.38 147.8,25.38 148.39,24.79 152.36,24.79 | v158.07,11.3 158.94,12.17 158.94,18.2 152.36,24.79 | PANEL.8 152.4,24.83 152.36,24.79
  Bottom 1.778: v73.66,16.51 74.8,17.65 75.72,17.65 75.73,17.65 77.47,17.65 79.21,17.65 79.22,17.65 80.8,17.65 80.81,17.65 83.02,17.65 83.03,17.65 v84.61,17.65 v84.62,17.65 86.36,17.65 88.1,17.65 88.11,17.65 89.69,17.65 89.7,17.65 v90.81,17.65 91.91,17.65 91.92,17.65 93.5,17.65 93.51,17.65 95.25,17.65 96.99,17.65 97,17.65 98.58,17.65 98.59,17.65 100.71,17.65 100.97,17.4 104.65,17.4 105.85,18.6 111.23,18.6 111.27,18.64 113.8,18.64 114.48,17.96
  other vias: 63.5,13.97 63.5,11.43 63.5,8.89 66.04,8.89 68.58,8.89 73.66,8.89 71.12,11.43 71.12,13.77 66.04,16.51 68.38,16.51 68.58,13.97 68.58,11.43
  pour Top (rank 3): 58.42,13.97 62.23,13.97 66.04,17.78 76.2,17.78 76.2,9.65 72.9,6.35 62.23,6.35 62.23,11.43 58.42,11.43
  pour Bottom (rank 3): 58.42,13.97 62.23,13.97 66.04,17.78 76.2,17.78 76.2,9.65 72.9,6.35 62.23,6.35 62.23,11.43 58.42,11.43
+5V  (via drill 0.4)  (12 unrouted)
  Top 0.305: IC13.34 178.59,20.93 176.19,23.33 R85.2 176.19,23.19 | IC6.34 200.18,20.93 198.78,22.32 198.78,22.36 R61.2 197.78,23.19 197.39,23.58 C48.1 | IC8.34 221.77,20.93 220.37,22.32 | 219.37,23.19 R69.2 | IC9.34 243.36,20.93 241.96,22.32 | 240.96,23.19 R73.2 | IC10.34 264.95,20.93 263.55,22.32 | 262.55,23.19 R77.2 | IC7.34 292.11,12.42 R65.2 292.39,13.82 292.76,14.19 292.76,14.34 C61.1
  Top 0.508: IC2.3 60.17,10.16 v58.42,10.16 | C12.1 56.36,4.79 L3.2
  Top 0.61: v71.75,28.83 71.75,28.61 5V.A 71.52,26.53 69.84,26.53 69.34,26.03 69.34,24 J5.2
  Top 0.813: C61.1 293.15,15.02 294.16,16.02 294.16,23.45 292.69,24.92 281.15,24.92 279.72,26.35 v279.72,27
  Bottom 0.61: v71.75,28.83 71.75,30.99 71.12,31.62
  Bottom 1.27: PANEL.1 160.02,31.62 | v279.72,27 275.09,31.62 160.02,31.62 | v58.42,10.16 57.4,11.18 57.4,14.22 58.42,15.24 58.42,29.21 60.83,31.62 71.12,31.62 160.02,31.62
  pour Top (rank 2): 55.12,3.81 55.12,8.13 58.42,11.43 62.23,11.43 62.23,4.19 61.85,3.81
+12V  (via drill 0.4)  (15 unrouted)
  Top 0.305: IC13.21 185.23,16.62 C129.1 | IC13.40 IC13.39 174.18,17.12 C132.1 | IC6.21 206.82,16.62 C50.1 | IC6.40 IC6.39 195.77,17.12 C53.1 | IC8.21 228.41,16.62 C76.1 | IC8.40 IC8.39 217.36,17.12 C79.1 | IC9.21 250,16.62 C89.1 | IC9.40 IC9.39 238.95,17.12 C92.1 | IC10.21 271.59,16.62 C102.1 | IC10.40 IC10.39 260.54,17.12 C105.1 | C53.1 194.44,17.44 C51.1 | C49.2 195.12,17.44 C53.1 | C92.1 237.62,17.44 C90.1 | C88.2 238.3,17.44 C92.1 | C77.1 216.03,17.44 C79.1 | C75.2 216.71,17.44 C79.1 | IC7.21 287,5.48 287.15,5.33 287.32,5.33 287.54,5.12 | IC7.40 287,16.55 C62.2 | IC7.39 287.5,16.81 C62.2 | C62.2 C64.1 289.66,16.93 290.62,17.89 290.62,17.95 | C62.2 287.38,17.03
  Top 0.406: 287.54,5.12 C63.1
  Top 0.61: C54.+ 187.7,27.29 187.7,25.06 184.66,22.02 v184.4,22.02 | C129.1 186.19,17.44 187.11,18.36 187.11,19.92 186.79,20.25 184.51,20.25 v184.15,19.89 | 290.62,17.95 290.79,17.95 | C66.1 292.95,17.03 292.03,17.95 290.79,17.95 | 290.79,17.95 290.62,18.12 290.62,19.41 290.29,19.74 282.19,19.74 278.75,23.17 278.75,29.46 278.57,29.65 | R1.2 15.24,8.3 D1.A | C128.2 173.53,17.44 C132.1 172.85,17.44 C130.1 | C67.+ 274.06,27.29 274.06,25.06 271.02,22.02 v270.76,22.02 | C102.1 272.56,17.44 273.47,18.36 273.47,19.92 273.15,20.25 270.87,20.25 v270.51,19.89 | C106.+ 255.66,30.47 252.47,27.29 252.47,25.06 249.43,22.02 v249.17,22.02 | C89.1 250.97,17.44 251.88,18.36 251.88,19.92 251.56,20.25 249.28,20.25 v248.92,19.89 | C93.+ 230.88,27.29 230.88,25.06 227.84,22.02 v227.58,22.02 | C76.1 229.38,17.44 230.29,18.36 230.29,19.92 229.97,20.25 227.69,20.25 v227.33,19.89 | C80.+ 209.29,27.29 209.29,25.06 206.25,22.02 v205.99,22.02 | C50.1 207.78,17.44 208.7,18.36 208.7,19.92 208.38,20.25 206.1,20.25 v205.74,19.89 | C101.2 259.89,17.44 C105.1 259.21,17.44 C103.1
  Top 0.813: C67.+ 278.57,29.65 282.28,25.94 293.11,25.94 296.77,22.28 296.77,3.44 295.39,2.07 293.63,2.07 C63.1 | VIN.A 72.68,31.59 72.64,31.62 | 0,0 v0,-1.42 | C133.+ 170.91,29.36 170.91,20.35 172.17,19.08 C128.2 | 255.66,30.47 257.26,28.87 257.26,20.35 258.53,19.08 C101.2
  Top 1.27: C67.+ 276.59,31.62 120.85,31.62 v119.42,30.19 | v100.71,29.21 100.51,29.41 100.5,29.41 99.93,29.99 99.93,30.05 98.35,31.62 72.64,31.62 56.13,31.62 FAN5.1 | PWRIN.1 11.68,9.14 D1.A
  Bottom 0.61: v184.4,22.02 184.15,21.77 v184.15,19.89 | v270.76,22.02 270.51,21.77 v270.51,19.89 | v249.17,22.02 248.92,21.77 v248.92,19.89 | v227.58,22.02 227.33,21.77 v227.33,19.89 | v205.99,22.02 205.74,21.77 v205.74,19.89
  Bottom 0.813: FAN3.1 FAN4.1 46.86,25.27 45.72,24.13 | FAN2.1 44.32,19.18 43.05,20.45
  Bottom 1.27: F3.1 F2.1 43.05,20.45 45.72,23.11 45.72,24.13 45.72,29.39 47.7,31.37 FAN6.1 FAN5.1 | v100.71,29.21 101.65,30.15 119.42,30.15
  Bottom 2.286: F3.1 F4.1
  Bottom 3.429: F4.1 17.78,18.03 11.68,18.03 8.89,15.24
  pour Top (no thermals): 8.89,7.62 13.97,7.62 13.97,10.16 11.43,12.7 11.43,29.97 10.16,31.24 7.62,31.24 6.35,29.97 6.35,10.16
  pour Bottom (no thermals): 8.89,7.62 13.97,7.62 13.97,10.16 11.43,12.7 11.43,29.97 10.16,31.24 7.62,31.24 6.35,29.97 6.35,10.16
A1_E1  (via drill 0.4)
  Top 0.305: v173.74,13.05 174.71,13.05 v174.76,13.1 175.28,13.62 IC13.46
  Top 0.61: X9.1 176.29,28.84 C134.1
  Bottom 1.27: v173.74,13.05 171.45,15.33 171.45,24 X9.1
  pour Bottom (rank 2, no thermals): 175.26,13.97 172.72,16.51 172.72,22.86 177.8,27.94 177.8,31.75 175.26,31.75 175.26,29.21 170.18,24.13 170.18,15.24 173.35,12.06 175.51,12.06 175.51,13.72
A1_E2  (via drill 0.4)
  Top 0.305: v195.33,13.05 196.3,13.05 v196.35,13.1 196.87,13.62 IC6.46
  Top 0.61: X2.1 197.88,28.84 C55.1
  Bottom 1.27: v195.33,13.05 193.04,15.33 193.04,24 X2.1
  pour Bottom (rank 2, no thermals): 196.85,13.97 194.31,16.51 194.31,22.86 199.39,27.94 199.39,31.75 196.85,31.75 196.85,29.21 191.77,24.13 191.77,15.24 194.94,12.06 197.1,12.06 197.1,13.72
A1_E3  (via drill 0.4)
  Top 0.305: v216.92,13.05 217.89,13.05 v217.94,13.1 218.46,13.62 IC8.46
  Top 0.61: X4.1 219.47,28.84 C81.1
  Bottom 1.27: v216.92,13.05 214.63,15.33 214.63,24 X4.1
  pour Bottom (rank 2, no thermals): 218.44,13.97 215.9,16.51 215.9,22.86 220.98,27.94 220.98,31.75 218.44,31.75 218.44,29.21 213.36,24.13 213.36,15.24 216.53,12.06 218.69,12.06 218.69,13.72
A1_X  (via drill 0.4)  (1 unrouted)
  Top 0.305: v238.51,13.05 239.48,13.05 v239.53,13.1 240.05,13.62 IC9.46
  Top 0.61: X5.1 241.06,28.84 238.76,28.84
  Bottom 1.27: v238.51,13.05 236.22,15.33 236.22,24 X5.1
  pour Bottom (rank 2, no thermals): 240.03,13.97 237.49,16.51 237.49,22.86 242.57,27.94 242.57,31.75 240.03,31.75 240.03,29.21 234.95,24.13 234.95,15.24 238.12,12.06 240.28,12.06 240.28,13.72
A1_Y  (via drill 0.4)
  Top 0.305: v260.1,13.05 261.07,13.05 v261.12,13.1 261.64,13.62 IC10.46
  Top 0.61: X6.1 262.65,28.84 C107.1
  Bottom 1.27: v260.1,13.05 257.81,15.33 257.81,24 X6.1
  pour Bottom (rank 2, no thermals): 261.62,13.97 259.08,16.51 259.08,22.86 264.16,27.94 264.16,31.75 261.62,31.75 261.62,29.21 256.54,24.13 256.54,15.24 259.71,12.06 261.87,12.06 261.87,13.72
A1_Z  (via drill 0.4)
  Top 0.305: IC7.46 v284,16.17
  Top 0.61: C68.1 281.95,16.25 v282.96,16.25
  Top 0.762: v282.96,16.25 283.56,16.25 283.57,16.24 283.93,16.24 v284,16.17
  Bottom 1.27: X7.1 282.83,28.32 282.83,16.38 v282.96,16.25
  pour Bottom (rank 2, no thermals): 281.94,15.24 280.67,16.51 280.67,29.21 283.21,31.75 285.75,31.75 285.75,29.08 284.61,27.94 283.34,26.67 283.34,23.11 283.34,18.03 284.48,16.89 284.73,16.64 284.73,15.49 284.48,15.24
A2_E1  (via drill 0.4)
  Top 0.305: IC13.42 175.25,15.62 v174.76,16.11 174.71,16.16 v173.74,16.16
  Top 0.61: C135.1 179.07,25.51 X9.2
  Bottom 1.27: v173.74,16.16 173.74,22.73 179.07,28.07 X9.2
  pour Bottom (no thermals): 175.51,15.24 173.48,15.24 172.97,15.75 172.97,23.11 177.8,27.94 177.8,31.75 180.09,31.75 180.09,26.92 175.51,22.35
A2_E2  (via drill 0.4)
  Top 0.305: IC6.42 196.84,15.62 v196.35,16.11 196.3,16.16 v195.33,16.16
  Top 0.61: C56.1 200.66,25.51 X2.2
  Bottom 1.27: v195.33,16.16 195.33,22.73 200.66,28.07 X2.2
  pour Bottom (no thermals): 197.1,15.24 195.07,15.24 194.56,15.75 194.56,23.11 199.39,27.94 199.39,31.75 201.68,31.75 201.68,26.92 197.1,22.35
A2_E3  (via drill 0.4)
  Top 0.305: IC8.42 218.43,15.62 v217.94,16.11 217.89,16.16 v216.92,16.16
  Top 0.61: C82.1 222.25,25.51 X4.2
  Bottom 1.27: v216.92,16.16 216.92,22.73 222.25,28.07 X4.2
  pour Bottom (no thermals): 218.69,15.24 216.66,15.24 216.15,15.75 216.15,23.11 220.98,27.94 220.98,31.75 223.27,31.75 223.27,26.92 218.69,22.35
A2_X  (via drill 0.4)
  Top 0.305: IC9.42 240.02,15.62 v239.53,16.11 239.48,16.16 v238.51,16.16
  Top 0.61: C95.1 243.84,25.51 X5.2
  Bottom 1.27: v238.51,16.16 238.51,22.73 243.84,28.07 X5.2
  pour Bottom (no thermals): 240.28,15.24 238.25,15.24 237.74,15.75 237.74,23.11 242.57,27.94 242.57,31.75 244.86,31.75 244.86,26.92 240.28,22.35
A2_Y  (via drill 0.4)
  Top 0.305: IC10.42 261.61,15.62 v261.12,16.11 261.07,16.16 v260.1,16.16
  Top 0.61: C108.1 265.43,25.51 X6.2
  Bottom 1.27: v260.1,16.16 260.1,22.73 265.43,28.07 X6.2
  pour Bottom (no thermals): 261.87,15.24 259.84,15.24 259.33,15.75 259.33,23.11 264.16,27.94 264.16,31.75 266.45,31.75 266.45,26.92 261.87,22.35
A2_Z  (via drill 0.4)
  Top 0.305: IC7.42 286,15.88 285.88,16 285.88,16.22
  Top 0.61: X3.2 287.02,22.64 285.03,20.64 282.87,20.64 C69.1 | 286.09,16.43 285.88,16.22
  Top 0.762: v285.91,16.25 286.09,16.43 v286.09,17.27
  Bottom 1.27: X3.2 287.02,18.2 v286.09,17.27
  pour Bottom (no thermals): 284.73,15.62 284.73,18.03 285.75,19.05 285.75,25.4 288.04,25.4 288.04,17.53 287.02,16.51 287.02,15.24 285.12,15.24
A_Z2
  Bottom 1.524: X3.1 284.48,25.15 287.02,27.69 X7.2
ADVREF
  Top 0.305: 110.06,15.53 110.06,15.51 109,14.45 L4.1 107.57,12.79 R43.2 R42.2 R41.2 R40.2 | IC3.1 112.8,15.88 111.34,15.88 C24.1
  Top 0.406: C24.1 110.06,15.53
ANTENNA
  Top 0.305: J4.SIG 148.21,4.57 147.31,5.47 L8.2 147.43,5.84 149.03,7.44 C117.1
B1_E1  (via drill 0.4)
  Top 0.305: IC13.15 185.4,13.62 v185.92,13.1 185.97,13.05 v186.94,13.05
  Top 0.61: X9.4 184.39,28.84 C136.1
  Bottom 1.27: v186.94,13.05 189.23,15.33 189.23,24 X9.4
  pour Bottom (rank 2, no thermals): 185.17,13.72 187.96,16.51 187.96,22.86 182.88,27.94 182.88,31.75 185.42,31.75 185.42,29.21 190.5,24.13 190.5,15.24 187.32,12.06 185.17,12.06
B1_E2  (via drill 0.4)
  Top 0.305: IC6.15 206.99,13.62 v207.51,13.1 207.56,13.05 v208.53,13.05
  Top 0.61: X2.4 205.98,28.84 C57.1
  Bottom 1.27: v208.53,13.05 210.82,15.33 210.82,24 X2.4
  pour Bottom (rank 2, no thermals): 206.76,13.72 209.55,16.51 209.55,22.86 204.47,27.94 204.47,31.75 207.01,31.75 207.01,29.21 212.09,24.13 212.09,15.24 208.91,12.06 206.76,12.06
B1_E3  (via drill 0.4)
  Top 0.305: IC8.15 228.58,13.62 v229.1,13.1 229.15,13.05 v230.12,13.05
  Top 0.61: X4.4 227.57,28.84 C83.1
  Bottom 1.27: v230.12,13.05 232.41,15.33 232.41,24 X4.4
  pour Bottom (rank 2, no thermals): 228.35,13.72 231.14,16.51 231.14,22.86 226.06,27.94 226.06,31.75 228.6,31.75 228.6,29.21 233.68,24.13 233.68,15.24 230.5,12.06 228.35,12.06
B1_X  (via drill 0.4)
  Top 0.305: IC9.15 250.17,13.62 v250.69,13.1 250.74,13.05 v251.71,13.05
  Top 0.61: X5.4 249.16,28.84 C96.1
  Bottom 1.27: v251.71,13.05 254,15.33 254,24 X5.4
  pour Bottom (rank 2, no thermals): 249.94,13.72 252.73,16.51 252.73,22.86 247.65,27.94 247.65,31.75 250.19,31.75 250.19,29.21 255.27,24.13 255.27,15.24 252.09,12.06 249.94,12.06
B1_Y  (via drill 0.4)
  Top 0.305: IC10.15 271.76,13.62 v272.28,13.1 272.33,13.05 v273.3,13.05
  Top 0.61: X6.4 270.75,28.84 C109.1
  Bottom 1.27: v273.3,13.05 275.59,15.33 275.59,24 X6.4
  pour Bottom (rank 2, no thermals): 271.53,13.72 274.32,16.51 274.32,22.86 269.24,27.94 269.24,31.75 271.78,31.75 271.78,29.21 276.86,24.13 276.86,15.24 273.69,12.06 271.53,12.06
B1_Z  (via drill 0.4)
  Top 0.305: v284.09,5.09 284,5.17 IC7.15
  Top 0.61: 289.56,22.64 X3.3 | C70.1 283.66,3.83 v283.89,4.06
  Top 0.762: v283.89,4.06 283.89,4.88 v284.09,5.09
  Bottom 1.27: v284.09,5.09 284.09,5.45 285.12,6.48 289.81,6.48 291.59,8.26 291.59,20.14 289.56,22.17 X3.3
  pour Bottom (rank 2, no thermals): 283.21,3.81 283.21,6.35 284.48,7.62 288.8,7.62 290.19,9.02 290.19,19.05 288.54,20.7 288.54,25.4 289.81,25.4 290.83,24.38 290.83,21.46 292.61,19.68 292.61,7.75 290.7,5.84 285.5,5.84 284.99,5.33 284.99,3.94 284.23,3.17 283.85,3.17
B2_E1  (via drill 0.4)
  Top 0.305: v186.94,16.16 185.97,16.16 v185.92,16.11 185.43,15.62 IC13.19
  Top 0.61: X9.3 181.61,28.99 184.66,25.94 C137.1
  Bottom 1.27: v186.94,16.16 186.94,22.73 181.61,28.07 X9.3
  pour Bottom (no thermals): 185.17,15.24 187.2,15.24 187.71,15.75 187.71,23.11 182.88,27.94 182.88,31.75 180.59,31.75 180.59,26.92 185.17,22.35
B2_E2  (via drill 0.4)
  Top 0.305: v208.53,16.16 207.56,16.16 v207.51,16.11 207.02,15.62 IC6.19
  Top 0.61: X2.3 203.2,28.99 206.25,25.94 C58.1
  Bottom 1.27: v208.53,16.16 208.53,22.73 203.2,28.07 X2.3
  pour Bottom (no thermals): 206.76,15.24 208.79,15.24 209.3,15.75 209.3,23.11 204.47,27.94 204.47,31.75 202.18,31.75 202.18,26.92 206.76,22.35
B2_E3  (via drill 0.4)
  Top 0.305: v230.12,16.16 229.15,16.16 v229.1,16.11 228.61,15.62 IC8.19
  Top 0.61: C84.1 227.84,25.94 224.79,28.99 X4.3
  Bottom 1.27: v230.12,16.16 230.12,22.73 224.79,28.07 X4.3
  pour Bottom (no thermals): 228.35,15.24 230.38,15.24 230.89,15.75 230.89,23.11 226.06,27.94 226.06,31.75 223.77,31.75 223.77,26.92 228.35,22.35
B2_X  (via drill 0.4)
  Top 0.305: v251.71,16.16 250.74,16.16 v250.69,16.11 250.2,15.62 IC9.19
  Top 0.61: X5.3 246.38,28.99 249.43,25.94 C97.1
  Bottom 1.27: v251.71,16.16 251.71,22.73 246.38,28.07 X5.3
  pour Bottom (no thermals): 249.94,15.24 251.97,15.24 252.48,15.75 252.48,23.11 247.65,27.94 247.65,31.75 245.36,31.75 245.36,26.92 249.94,22.35
B2_Y  (via drill 0.4)
  Top 0.305: v273.3,16.16 272.33,16.16 v272.28,16.11 271.79,15.62 IC10.19
  Top 0.61: X6.3 267.97,28.99 271.02,25.94 C110.1
  Bottom 1.27: v273.3,16.16 273.3,22.73 267.97,28.07 X6.3
  pour Bottom (no thermals): 271.53,15.24 273.56,15.24 274.07,15.75 274.07,23.11 269.24,27.94 269.24,31.75 266.95,31.75 266.95,26.92 271.53,22.35
B2_Z  (via drill 0.4)
  Top 0.305: IC7.19 286,5.17 v285.91,5.09
  Top 0.61: X7.4 294.12,29.97 C71.1
  Top 0.762: v286.8,4.54 286.7,4.54 286.41,4.84 286.16,4.84 v285.91,5.09
  Bottom 1.27: v286.8,4.54 292.45,4.54 293.75,5.84 293.75,28.32 X7.4